# Altium PCB TSMP22v1.PcbDoc
Units mil, origin at the board's own origin, x right, y up, seen from the top; angles counter-clockwise.
Board outline 4440 x 1676 mil, 2 copper layers (Top Layer, Bottom Layer); 2 components, 4 nets, 12 pads, 2 vias.
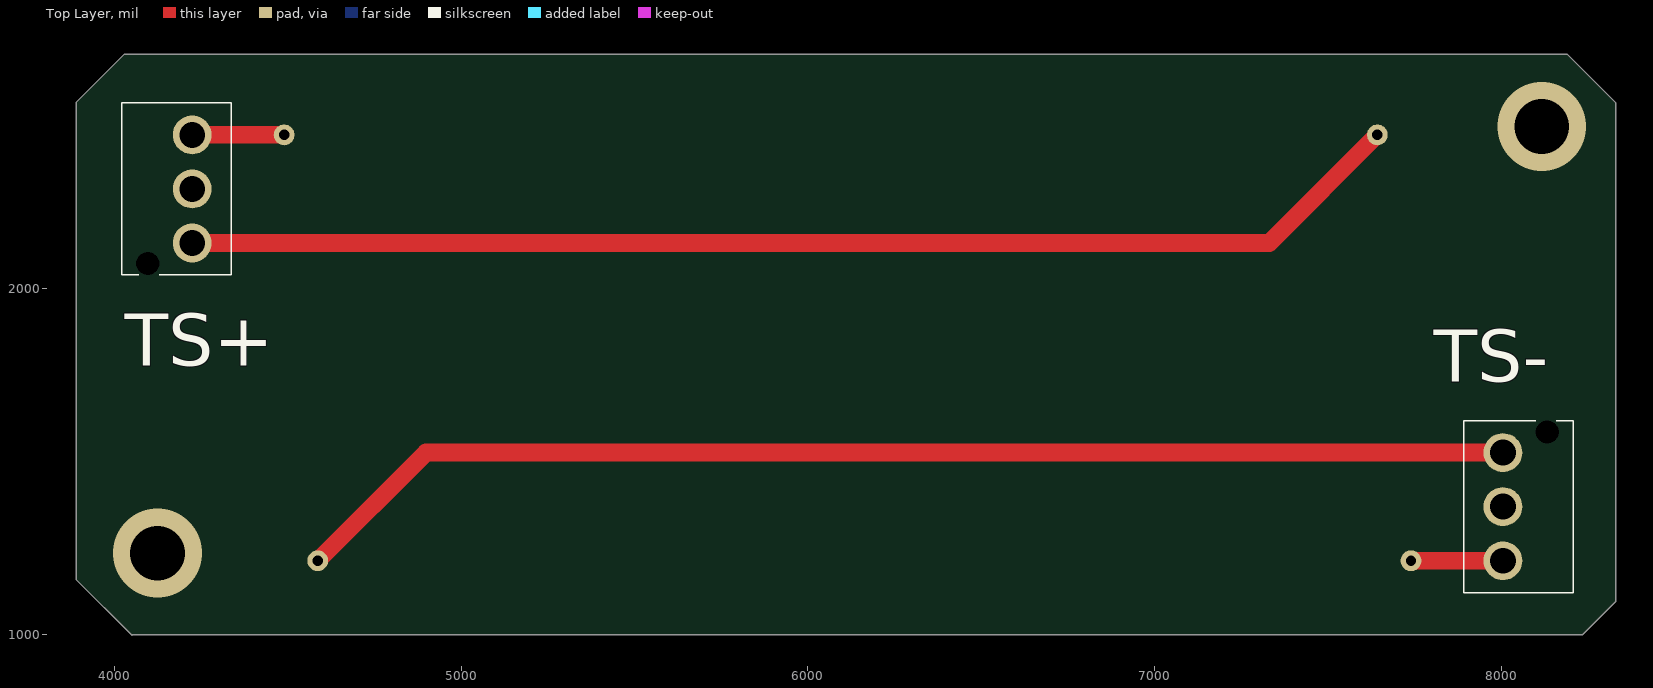
[diagram p0: Top Layer view]
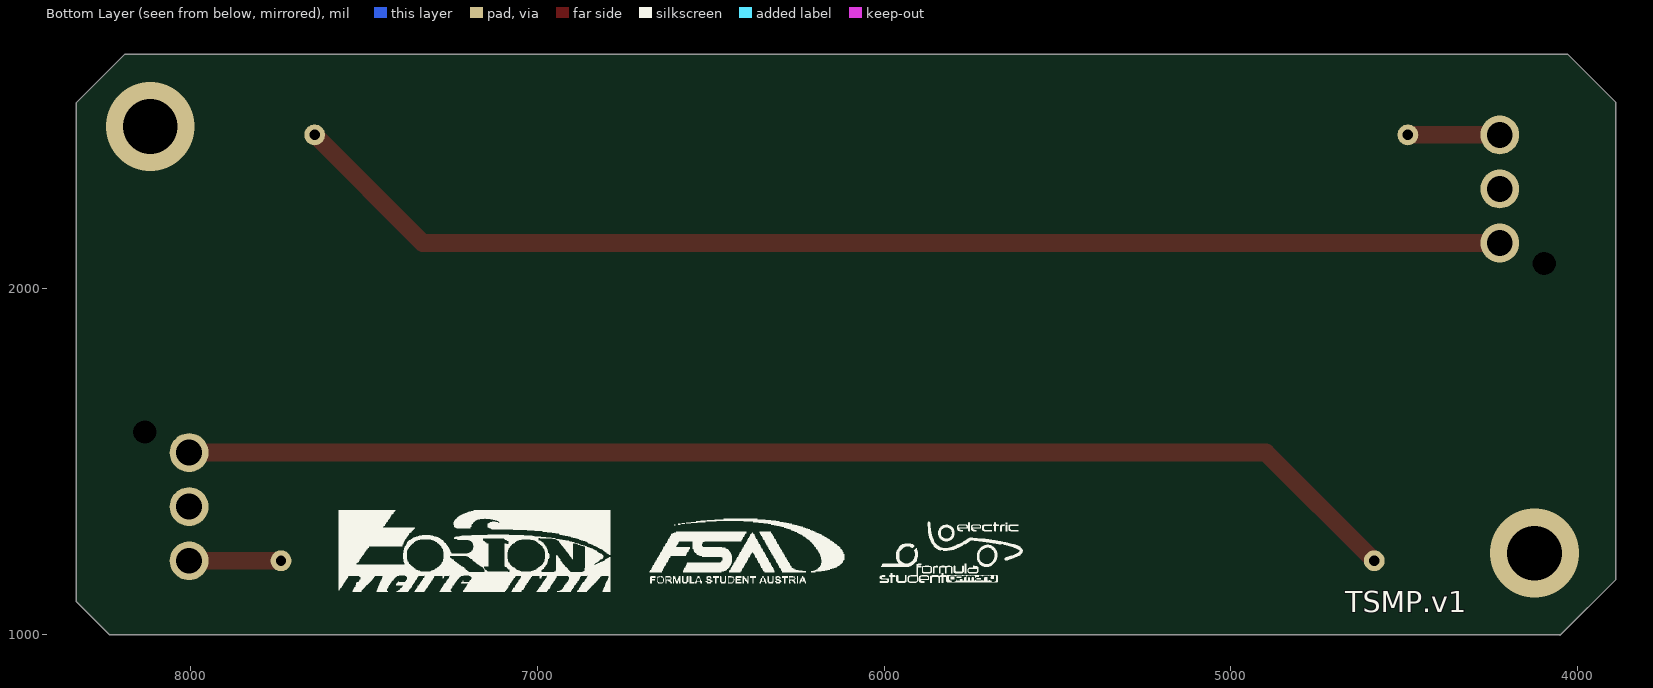
[diagram p1: Bottom Layer view, seen from below]

## Layer stack, top to bottom
Top Solder: solder mask 0.4, Solder Resist, Dk 3.5
Top Layer: signal copper 1.4
Dielectric 1: dielectric 12.6, FR-4, Dk 4.8
Bottom Layer: signal copper 1.4
Bottom Solder: solder mask 0.4, Solder Resist, Dk 3.5

## Board outline
3890,2535 3890,1160 4051,999 4052,1000 8233,1000 8330,1097 8330,2534 8189,2675 4030,2675

## Design rules (kind name [scope] priority, off if disabled: settings)
Clearance [All] p1: gap=10 ignorepadtopadclearanceinfootprint=FALSE except(0: Arc-Hole Track-Hole SMDPad-Hole THPad-Hole Via-Hole Fill-Hole Poly-Hole Region-Hole Text-Hole)
PolygonConnect [All] p1: connectstyle=Relief reliefconductorwidth=10 reliefentries=4 polygonreliefangle="90 Angle" airgapwidth=10
RoutingVias [All] p1: holewidth=28 width=50 viastyle="Through Hole" minholewidth=28 minwidth=50 maxholewidth=28 maxwidth=50
SolderMaskExpansion [All] p1: expansion=4 istentingtop=FALSE
Width [All] p1: maxlimit=51.18 minlimit=51.18 preferedwidth=51.18 minimp=50.000000 maximp=50.000000 favimp=50.000000
30 further rules are at their usual default settings.

## Components (designator, comment, footprint, x,y, rotation, side; value= is the part's Value field where it differs from the comment)
TS+ "DF63-3P-3.96DS" DF633P396DS 4225,2442 r90 top
TS- "DF63-3P-3.96DS" DF633P396DS 8004,1214 r270 top

## Footprints (in the part's own frame and the unit in brackets; to place one, negate y for a bottom-side part, rotate by r counter-clockwise, add the part's x,y. Pads: shape width x height; smd on the part's side, far side on the other; paste and mask are expansions set on the pad)
DF633P396DS [mm]
  round 2.85 hole 1.9: 1(0,0) 2(-3.96,0) 3(-7.92,0)
  round 0.85 hole 1.7 unplated: MH1(-9.42,3.25)
  silkscreen extent -10.26,-2.85 2.35,5.15, body extent -10.27,-2.85 2.35,5.15, height 10.1

## Part data
TS+ TS-: "Connector", Manufacturer_Name=Hirose, Datasheet Link=https://www.mouser.co.uk/datasheet/2/185/DF63_catalog-1066197.pdf, Height=10mm, Manufacturer_Part_Number=DF63-3P-3.96DS

## Free pads (board coordinates)
  round 60 hole 30: 8(4490,2442) 9(7642,2442) 10(7739,1214) 13(4587,1214)

## Via types
v1: diameter 255.91/255.91 (per signal layer), hole 157.48, Top Layer to Bottom Layer, 2 vias

## Nets (pads, with @x,y where several pads share a name; then routed paths per layer and width w, separated by ;. In a path a pad name is that pad's centre, name@x,y a point inside that pad or via, vN(x,y) a via of type N, cw(c..) or ccw(c..) an arc to the next point about the centre after c; other vN are vias at no path point)
TS+_HV: pad.8 TS+.1 | length 265
  Top Layer w51.18: TS+.1 pad.8
TS+_MP: pad.9 TS+.3 | length 3546.2
  Top Layer w51.18: TS+.3 7330.19,2130.19 pad.9
TS-_HV: pad.10 TS-.1 | length 265
  Top Layer w51.18: pad.10 TS-.1
TS-_MP: pad.13 TS-.3 | length 3546.2
  Top Layer w51.18: pad.13 4898.81,1525.81 TS-.3
pads on no net: TS+.2 TS+.MH1 TS-.2 TS-.MH1
copper on no net:
  other v1: 4125,1236 8116,2466

## Silkscreen, mask and mechanical layers (free items; w line width, h text height)
Bottom Overlay:
  drawing of 65 lines, arcs and shapes, not listed
  text "TSMP.v1" at 4670,1065 h60